# Altium PCB Aliadin.PcbDoc
Units mm, origin at the board's own origin, x right, y up, seen from the top; angles counter-clockwise.
Board outline 50 x 50 mm, 2 copper layers (Top Layer, Bottom Layer); 14 components, 10 nets, 36 pads, 2 vias.
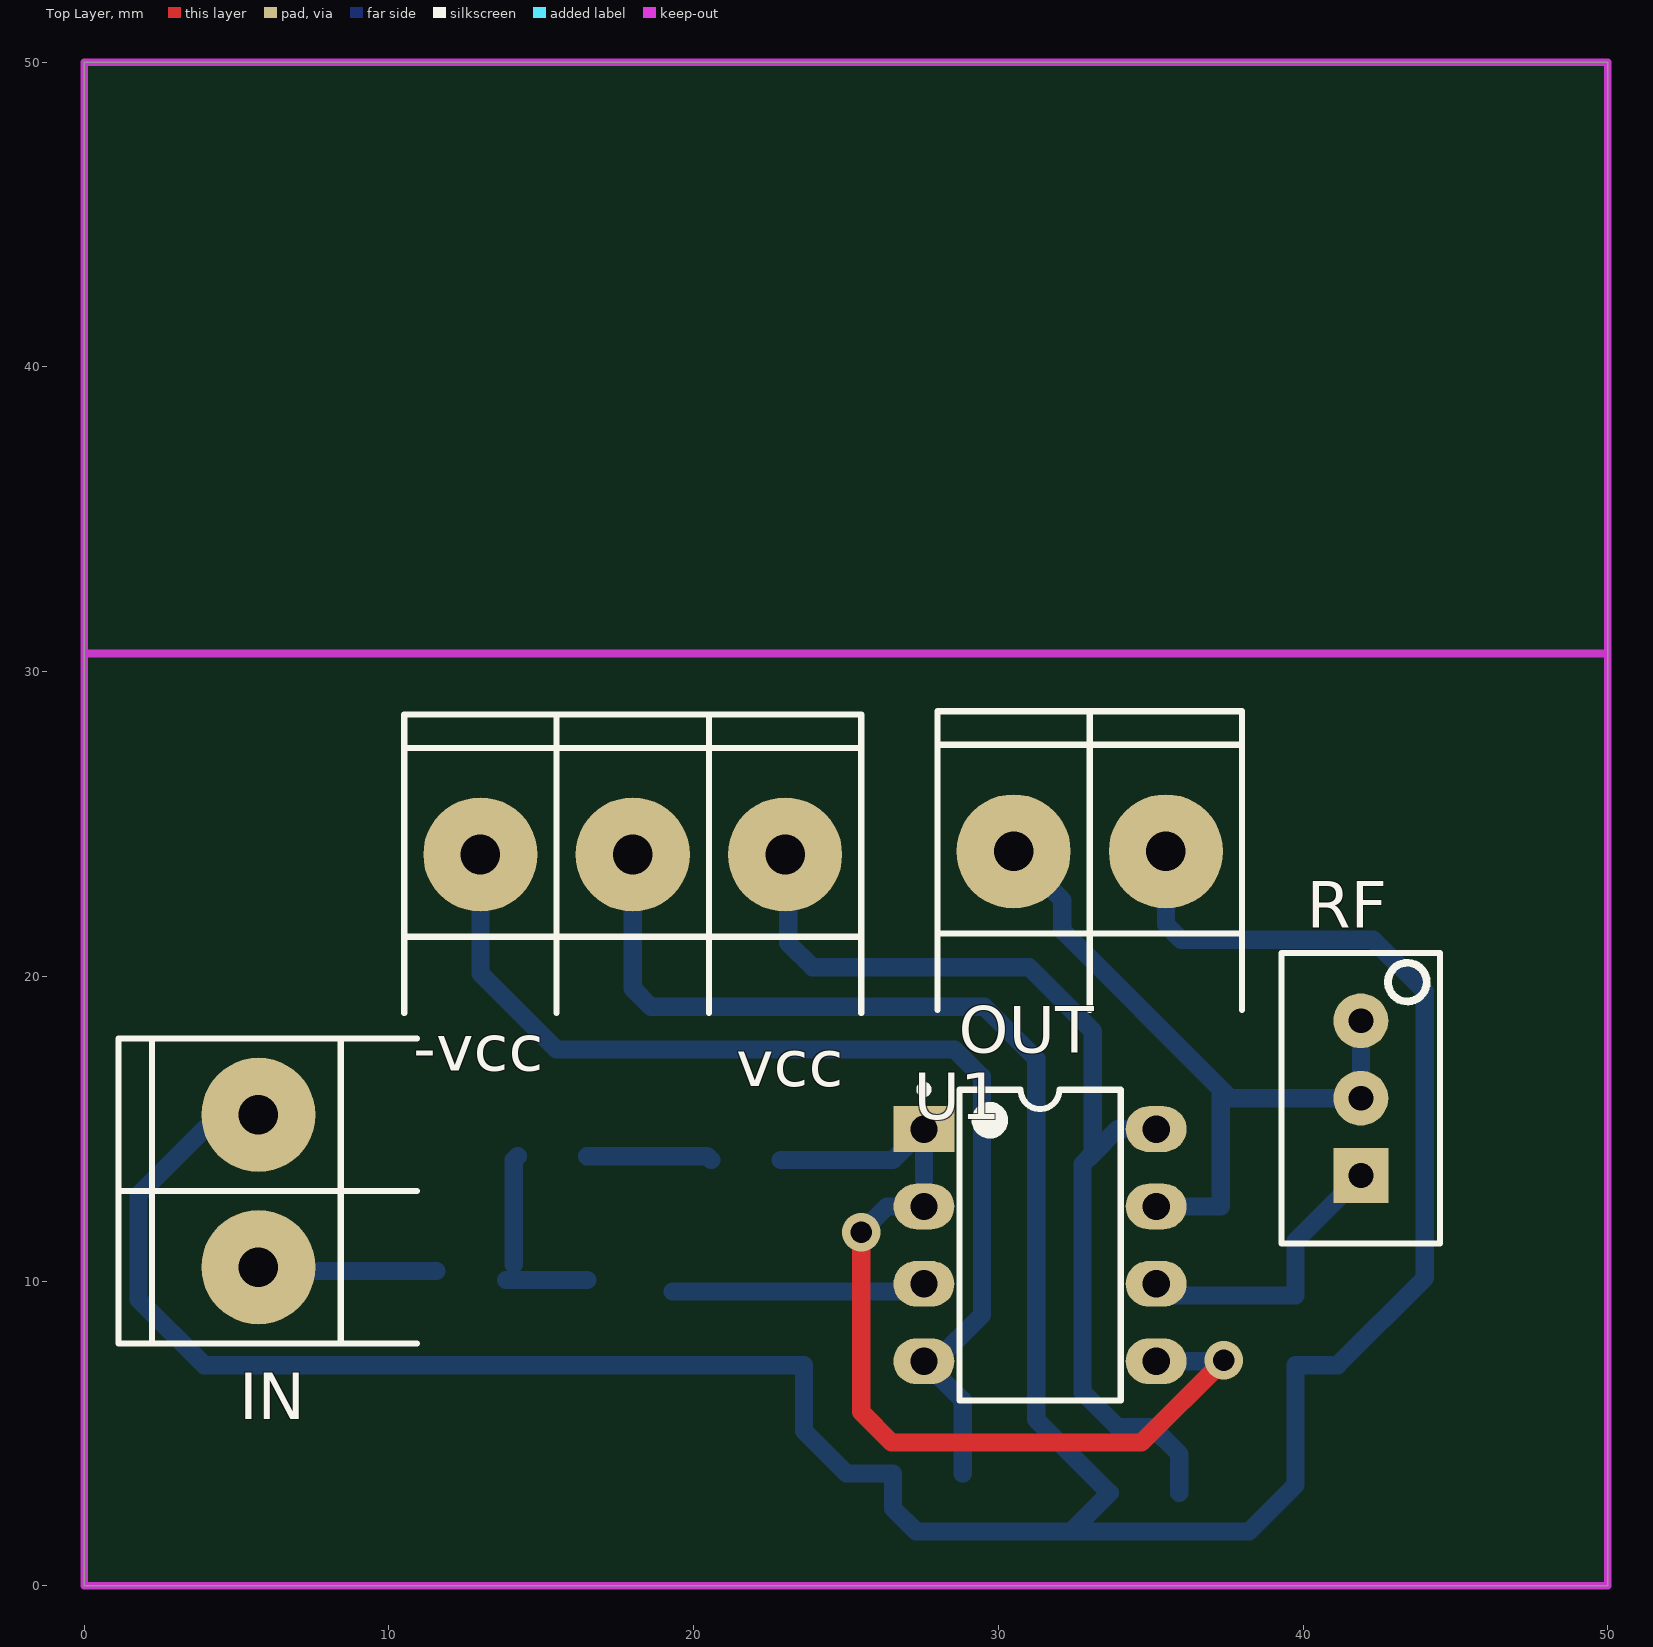
[diagram p0: Top Layer view]
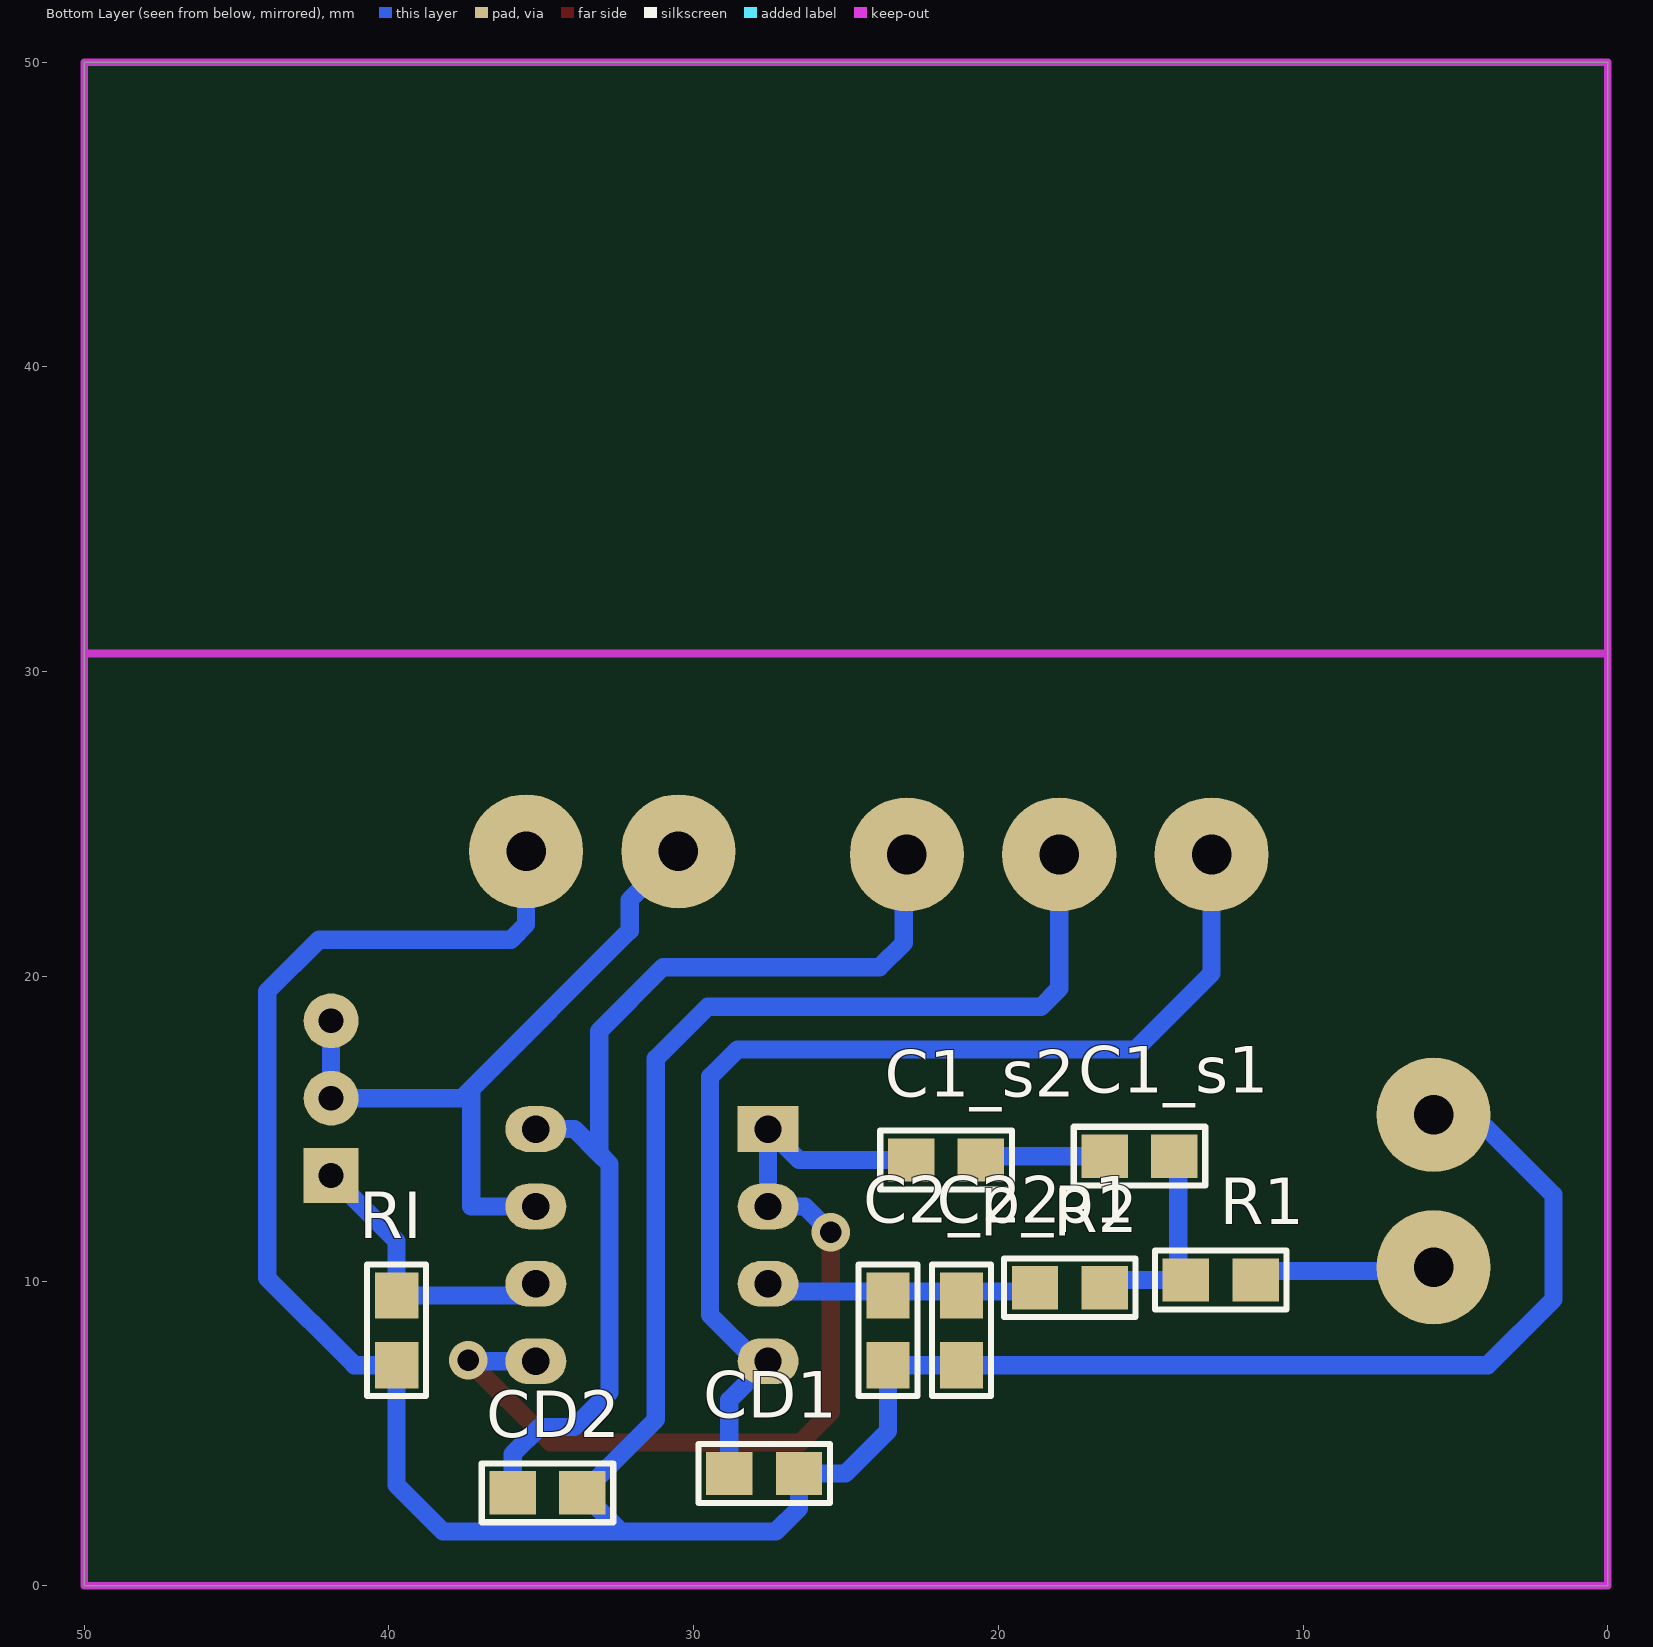
[diagram p1: Bottom Layer view, seen from below]
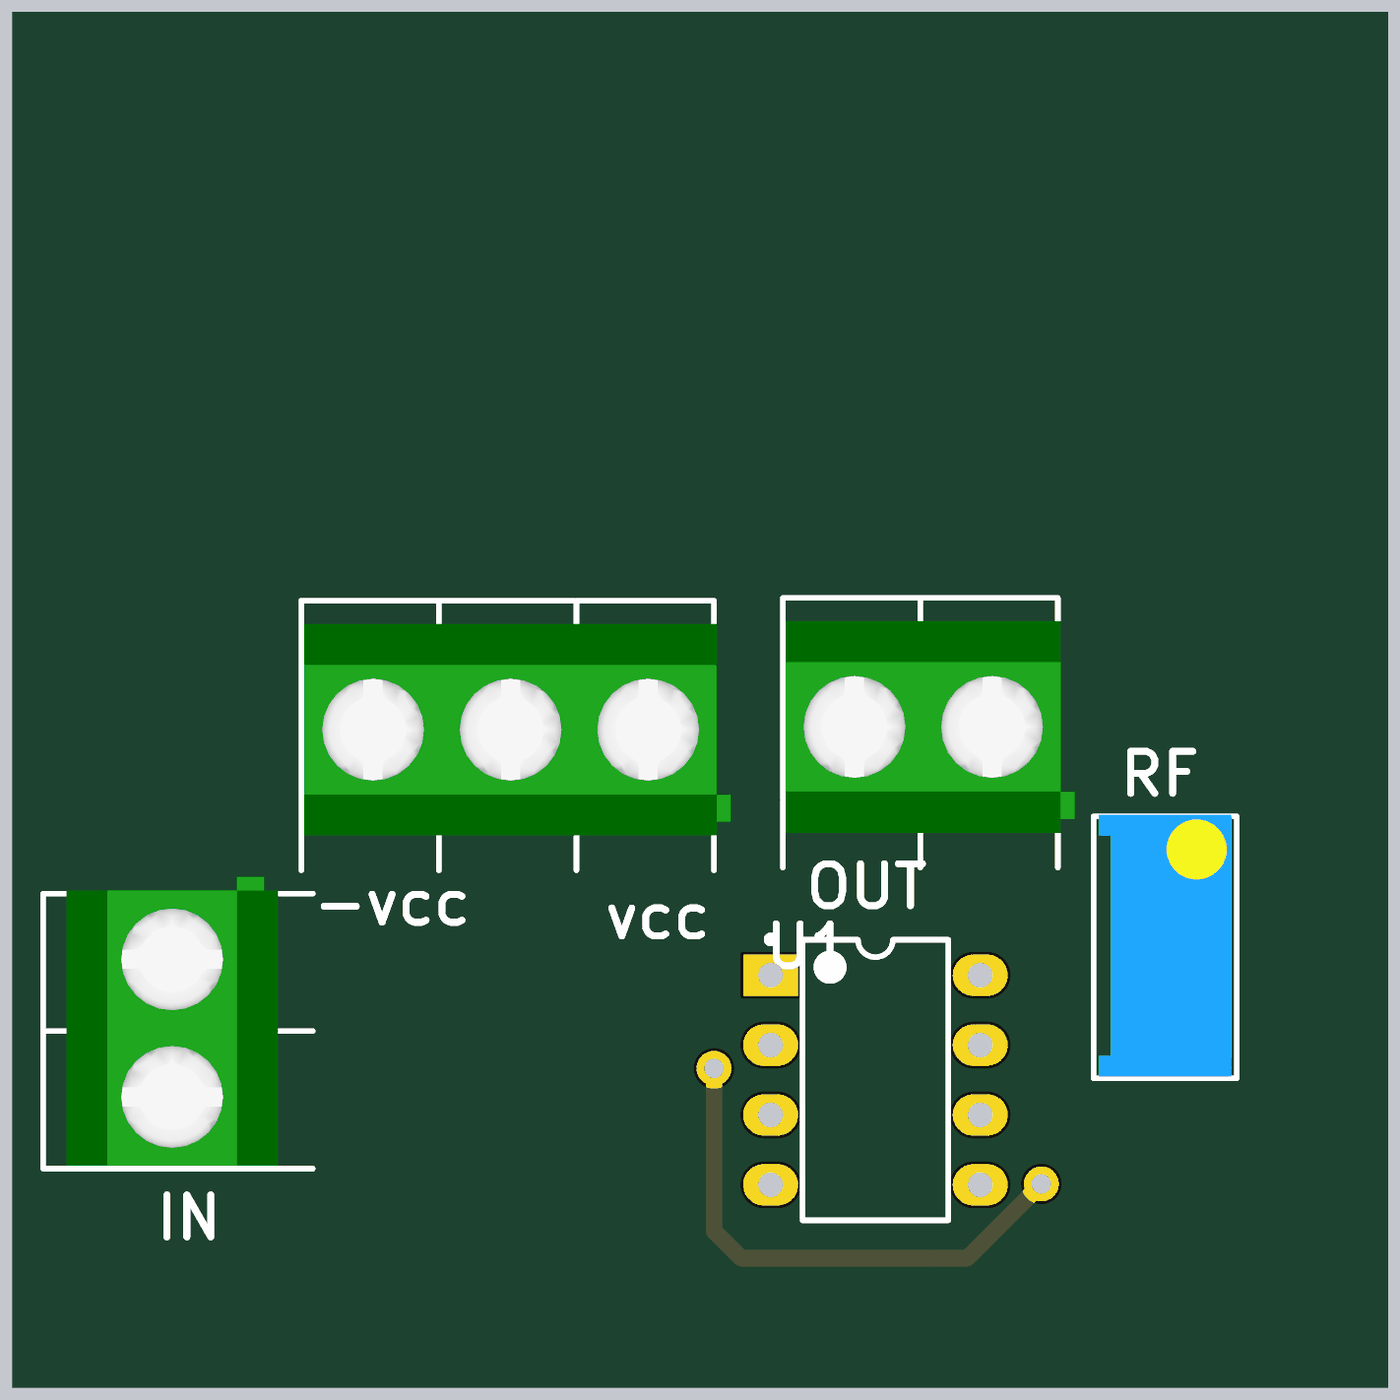
[diagram p2: 3D render of the assembled board from above, using the file's embedded part models]
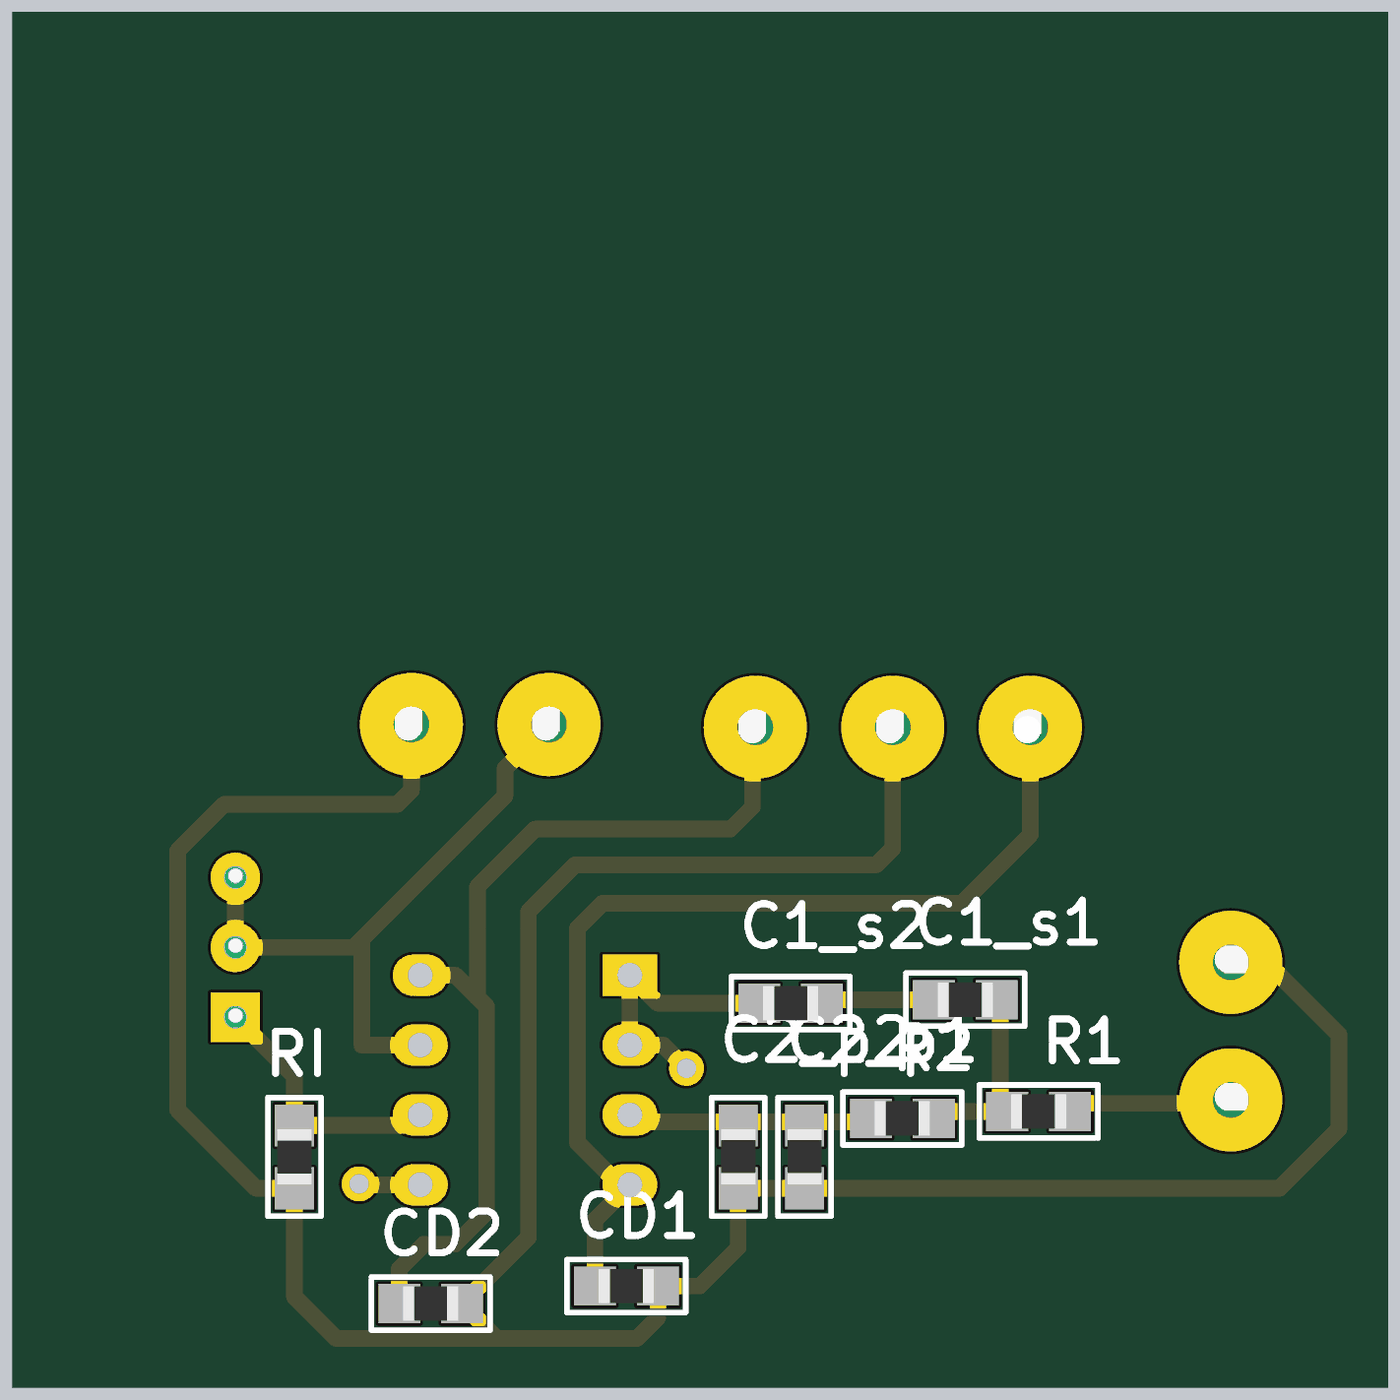
[diagram p3: 3D render of the assembled board from below, using the file's embedded part models]

## Layer stack, top to bottom
Top Solder: solder mask 0.0102, Solder Resist, Dk 3.5
Top Layer: signal copper 0.0356
Dielectric 1: dielectric 0.32, FR-4, Dk 4.8
Bottom Layer: signal copper 0.0356
Bottom Solder: solder mask 0.0102, Solder Resist, Dk 3.5

## Board outline
0,0 0,50 50,50 50,0

## Design rules (kind name [scope] priority, off if disabled: settings)
Clearance [All] p1: gap=0.254
PolygonConnect [All] p1: connectstyle=Relief reliefconductorwidth=0.254 reliefentries=4 polygonreliefangle="90 Angle" airgapwidth=0.254
RoutingVias [All] p1: holewidth=0.711 width=1.27 viastyle="Through Hole" minholewidth=0.711 minwidth=1.27 maxholewidth=0.711 maxwidth=1.27
SolderMaskExpansion [All] p1: expansion=0.102
Width [All] p1: maxlimit=0.6 minlimit=0.3 preferedwidth=0.4
30 further rules are at their usual default settings.

## Components (designator, comment, footprint, x,y, rotation, side; value= is the part's Value field where it differs from the comment)
C1_s1 "390p" 0805 15.367,14.097 r0 bottom
C1_s2 "15n" 0805 21.717,13.97 r0 bottom
C2_p1 "10p" 0805 21.209,8.382 r270 bottom
C2_p2 "180p" 0805 23.622,8.382 r270 bottom
CD1 "100n" 0805 27.686,3.683 r180 bottom
CD2 "100n" 0805 34.798,3.048 r180 bottom
IN "BORNERA 2" BORNERA2 5.715,12.954 r0 top
OUT "BORNERA 2" BORNERA2 33,24.1 r270 top
R1 "2k2" 0805 12.7,10.033 r180 bottom
R2 "2k2" 0805 17.653,9.779 r180 bottom
RF "PRESET" "PRESET V" 41.9,16 r90 top
RI "RES" 0805 39.751,8.382 r90 bottom
U1 "TL082ACP" TI-P8 31.369,11.176 r0 top
vcc "BORNERA 3" BORNERA3 18,24 r270 top (schematic designator VCC)

## Footprints (in the part's own frame and the unit in brackets; to place one, negate y for a bottom-side part, rotate by r counter-clockwise, add the part's x,y. Pads: shape width x height; smd on the part's side, far side on the other; paste and mask are expansions set on the pad)
0805 [mil] "Pasivo 0805"
  rect 60x56 smd: 1(-45,0) 2(45,0)
  silkscreen extent -85,-38 85,38, body extent -39,-25 39,25, height 15
BORNERA2 [mm] "Bornera con Tornillos 5mm separación"
  round 3.75 hole 1.3: 1(0,2.5) 2(0,-2.5)
  silkscreen extent -4.6,-5 5.2,5, body extent -3.76,-4.89 3.94,5.61, height 10
BORNERA3 [mm] "Bornera con Tornillos 5mm separación"
  round 3.75 hole 1.3: 1(0,5) 2(0,0) 3(0,-5)
  silkscreen extent -4.6,-7.5 5.2,7.5, body extent -3.76,-7.39 3.94,8.11, height 10.05
"PRESET V" [mm]
  rect 1.8x1.8 hole 0.813: 1(-2.54,0)
  round 1.8 hole 0.813: 2(0,0) 3(2.54,0)
  silkscreen extent -4.76,-2.6 4.76,2.6, body extent -4.7,-2.42 4.83,2.42, height 11.55
TI-P8 [mm] "DIP, 8-Leads, Body 9.59x6.35mm, Pitch 2.54mm"
  rect 2x1.5 hole 0.9: 1(-3.81,3.81)
  oval 2x1.5 hole 0.9: 2(-3.81,1.27) 3(-3.81,-1.27) 4(-3.81,-3.81) 5(3.81,-3.81) 6(3.81,-1.27) 7(3.81,1.27) 8(3.81,3.81)
  silkscreen extent -3.93,-5.1 2.65,5.23, body extent -3.95,-5.07 3.95,5.07, height 5.08

## Part data
C1_s1 C1_s2 C2_p1 C2_p2 CD1 CD2: library part CAP
R1 R2: library part RES
U1: "JFET-Input Operational Amplifier, 7 to 36 V, 0 to 70 degC, 8-pin DIP (P8), Pb-Free (RoHS)"

## Via types
v1: diameter 1.27, hole 0.711, Top Layer to Bottom Layer, 2 vias

## Nets (pads, with @x,y where several pads share a name; then routed paths per layer and width w, separated by ;. In a path a pad name is that pad's centre, name@x,y a point inside that pad or via, vN(x,y) a via of type N, cw(c..) or ccw(c..) an arc to the next point about the centre after c; other vN are vias at no path point)
-VCC: CD1.1 U1.4 vcc.3 | length 36.3
  Bottom Layer w0.6: vcc.3 13,20.1 15.5,17.6 28.564,17.6 29.464,16.7 29.464,8.89 27.94,7.366 U1.4 28.829,6.096 CD1.1
GND: C2_p1.2 C2_p2.2 CD1.2 CD2.2 IN.1 OUT.1 RI.1 vcc.2 | length 118.4
  Bottom Layer w0.6: IN.1 4.405,15.454 1.778,12.827 1.778,9.398 3.937,7.239 C2_p2.2 23.622,5.08 25.019,3.683 CD1.2 26.543,2.54 27.305,1.778 32.385,1.778 ; vcc.2 18,19.6 18.6,19 29.542,19 31.242,17.3 31.242,5.461 CD2.2 32.385,1.778 ; OUT.1 35.5,21.7 36,21.2 42.3,21.2 44,19.5 44,10.1 41.139,7.239 RI.1 39.751,3.302 38.227,1.778 32.385,1.778
NetC1_s1_1: C1_s1.1 R1.1 R2.2 | length 6.3
  Bottom Layer w0.6: R1.1 R2.2@16.51,10.033 ; R1.1@14.097,10.541 14.097,13.97 C1_s1.1
NetC1_s1_2: C1_s1.2 C1_s2.1 | length 4.1
  Bottom Layer w0.6: C1_s1.2 20.447,14.097 C1_s2.1
NetC1_s2_2: C1_s2.2 U1.1 U1.2 U1.5 | length 31.4
  Top Layer w0.6: v1(25.5,11.6) 25.5,5.7 26.5,4.7 34.7,4.7 v1(37.4,7.4)
  Bottom Layer w0.6: C1_s2.2 26.543,13.97 U1.1 U1.2 26.346,12.446 v1(25.5,11.6) ; U1.5 37.166,7.366 v1@37.2,7.4
NetC2_p1_1: C2_p1.1 C2_p2.1 R2.1 U1.3 | length 8.4
  Bottom Layer w0.6: R2.1@19.304,9.652 27.305,9.652 U1.3
NetIN_2: IN.2 R1.2 | length 5.8
  Bottom Layer w0.6: IN.2@5.715,10.327 R1.2@11.557,10.327
NetOUT_2: OUT.2 RF.2 RF.3 U1.7 | length 23.9
  Bottom Layer w0.6: OUT.2 32.1,22.5 32.1,21.5 37.3,16.3 ; U1.7 37.3,12.446 37.3,16.3 ; RF.3 RF.2 37.6,16 37.3,16.3
NetRF_1: RF.1 RI.2 U1.6 | length 9.6
  Bottom Layer w0.6: U1.6 35.56,9.525 RI.2 39.751,11.311 RF.1
VCC: CD2.1 U1.8 vcc.1 | length 33.8
  Bottom Layer w0.6: vcc.1 23.1,23.9 23.1,21.1 23.9,20.3 31,20.3 33.1,18.2 33.1,14.177 ; U1.8 33.909,14.986 33.1,14.177 ; CD2.1 35.941,4.318 35.052,5.207 33.909,5.207 32.766,6.35 32.766,13.843 33.1,14.177

## Keep-outs
Keep-Out Layer:
  lines w0.254: 0,30.6 49.9,30.6 50,30.5 ; 0,0 0,50 50,50 50,0 0,0

## Silkscreen, mask and mechanical layers (free items; w line width, h text height)
Top Overlay:
  text "-vcc" at 10.8,16.9 h1.52